# Altium PCB air_pod_case_ASCII2.PcbDoc
Units mm, origin at the board's own origin, x right, y up, seen from the top; angles counter-clockwise.
Board outline 166.05 x 139.83 mm, 2 copper layers (Top Layer, Bottom Layer); 9 components, 96 nets, 204 pads, 144 vias.
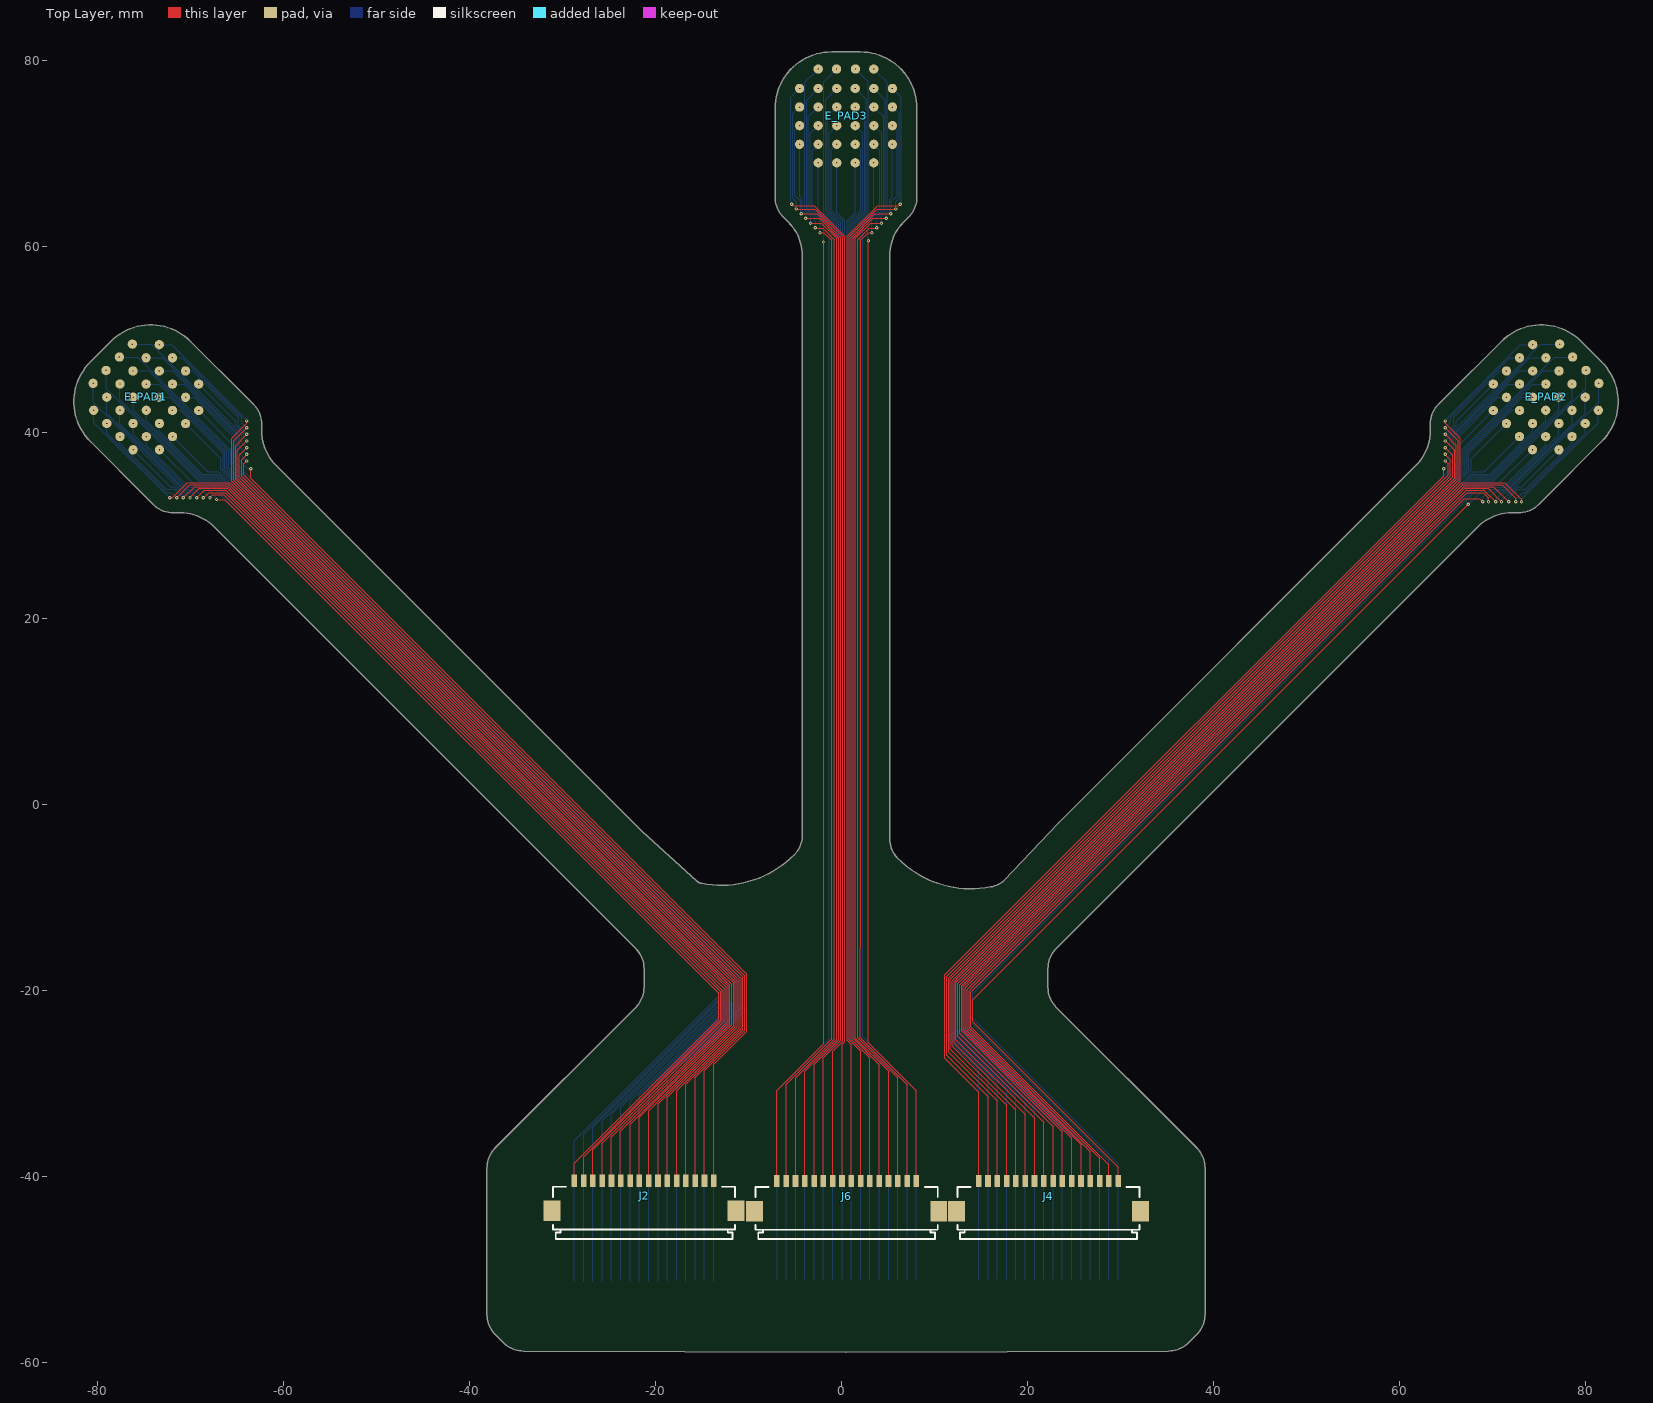
[diagram p0: Top Layer view]
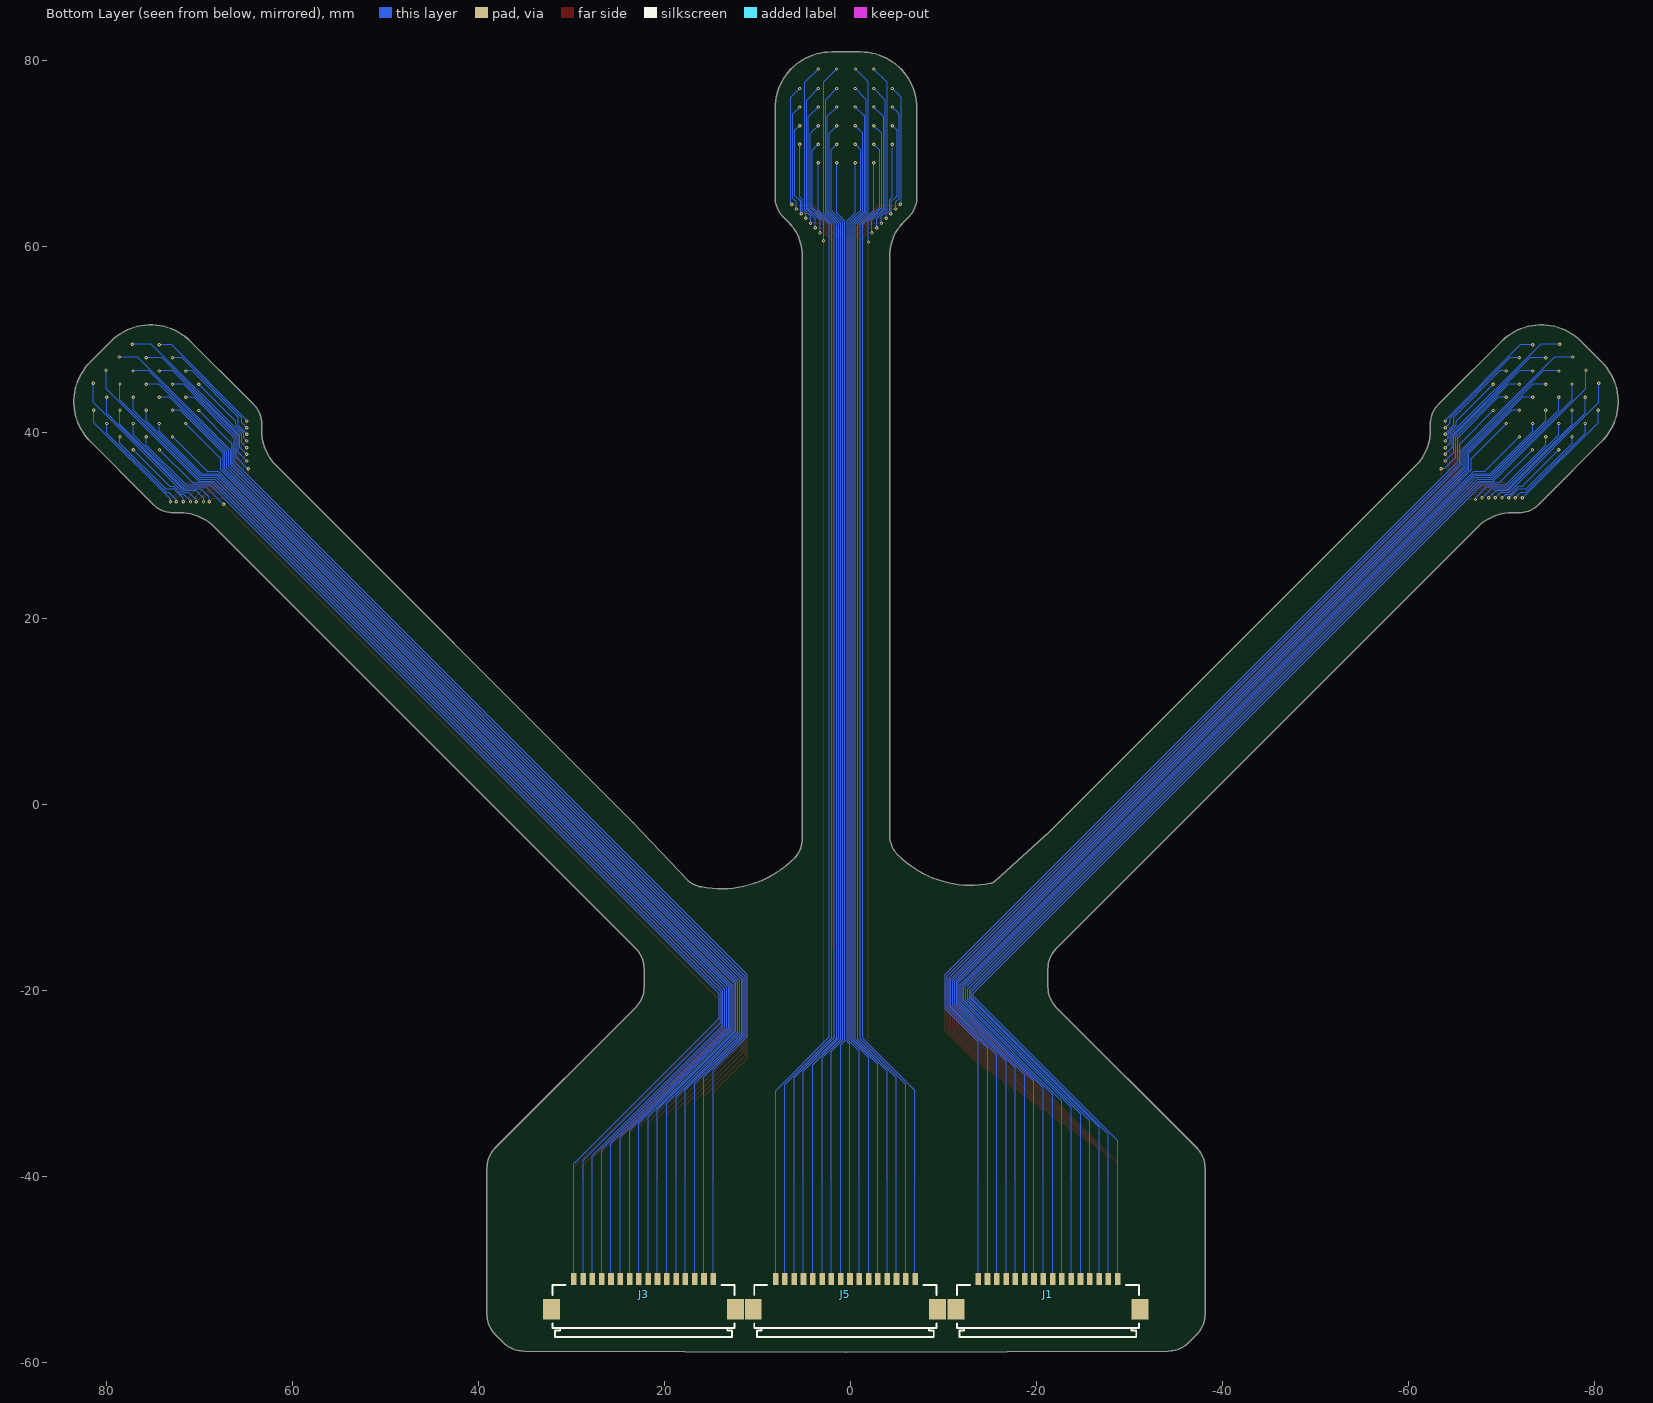
[diagram p1: Bottom Layer view, seen from below]

## Layer stack, top to bottom
Top Solder: solder mask 0.0102, Solder Resist, Dk 3.5
Top Layer: signal copper 0.0356
Dielectric 1: dielectric 0.32, FR-4, Dk 4.8
Bottom Layer: signal copper 0.0356
Bottom Solder: solder mask 0.0102, Solder Resist, Dk 3.5

## Board outline
-38.1,-54.864 -38.1,-39.116 cw(c-35.034,-39.116) -37.202,-36.948 -22.107,-21.853 ccw(c-24.275,-19.685) -21.209,-19.685 -21.209,-17.67 ccw(c-24.275,-17.67) -22.107,-15.502 -24.456,-13.153 -67.455,29.846 ccw(c-71.057,26.244) -71.057,31.338 -71.819,31.338 cw(c-71.819,34.404) -73.987,32.236 -74.526,32.774 -74.659,32.908 -80.745,38.993 cw(c-76.457,43.281) -80.745,47.569 -79.824,48.49 -79.465,48.849 -78.544,49.77 cw(c-74.256,45.482) -69.968,49.77 -63.883,43.684 -63.211,43.012 cw(c-65.379,40.844) -62.313,40.844 -62.313,40.082 ccw(c-57.219,40.082) -60.821,36.48 -21.378,-2.963 -15.552,-8.24 ccw(c-14.852,-7.544) -15.017,-8.518 -15.012,-8.518 ccw(c-12.933,2.379) -5.089,-5.465 -5.081,-5.462 ccw(c-7.249,-3.294) -4.183,-3.294 -4.183,1.778 -4.183,58.969 ccw(c-9.277,58.969) -5.675,62.571 -6.214,63.11 cw(c-4.046,65.278) -7.112,65.278 -7.112,74.835 cw(c-1.048,74.835) -1.048,80.899 2.064,80.899 cw(c2.064,74.835) 8.128,74.835 8.128,65.278 cw(c5.062,65.278) 7.23,63.11 6.691,62.571 ccw(c10.293,58.969) 5.199,58.969 5.199,1.651 5.199,-2.913 5.199,-3.675 ccw(c8.265,-3.675) 6.097,-5.843 6.105,-5.846 ccw(c13.949,1.998) 16.028,-8.899 ccw(c15.517,-5.876) 17.495,-8.218 23.346,-2.01 61.837,36.48 ccw(c58.235,40.082) 63.329,40.082 63.329,40.844 cw(c66.395,40.844) 64.227,43.012 64.765,43.551 64.899,43.684 70.984,49.77 cw(c75.272,45.482) 79.56,49.77 80.481,48.849 80.84,48.49 81.761,47.569 cw(c77.473,43.281) 81.761,38.993 75.675,32.908 75.003,32.236 cw(c72.835,34.404) 72.835,31.338 72.073,31.338 ccw(c72.073,26.244) 68.471,29.846 25.726,-12.899 25.472,-13.153 23.123,-15.502 ccw(c25.291,-17.67) 22.225,-17.67 22.225,-19.685 ccw(c25.291,-19.685) 23.123,-21.853 38.218,-36.948 cw(c36.05,-39.116) 39.116,-39.116 39.116,-54.864 cw(c36.05,-54.864) 38.218,-57.032 37.347,-57.903 cw(c35.179,-55.735) 35.179,-58.801 0.508,-58.928 -34.163,-58.801 cw(c-34.163,-55.735) -36.331,-57.903 -37.202,-57.032 cw(c-35.034,-54.864)
cut-out: -112.956,-207.435 -112.702,-207.435 -112.702,-207.181 -112.956,-207.181
cut-out: -112.956,-207.435 -112.702,-207.435 -112.702,-207.181 -112.956,-207.181

## Design rules (kind name [scope] priority, off if disabled: settings)
Clearance [All] p1: gap=0.254 ignorepadtopadclearanceinfootprint=FALSE except(0.1: Arc-Arc Arc-Track Arc-SMDPad Arc-THPad Arc-Via Arc-Fill Arc-Poly Arc-Region Arc-Text Arc-Hole Track-Track Track-SMDPad Track-THPad Track-Via Track-Fill Track-Poly Track-Region Track-Text Track-Hole)
PolygonConnect [All] p1: connectstyle=Relief reliefconductorwidth=0.254 reliefentries=4 polygonreliefangle="90 Angle" airgapwidth=0.254
RoutingVias [All] p1: holewidth=0.15 width=0.35 viastyle="Through Hole" minholewidth=0.15 minwidth=1.27 maxholewidth=1 maxwidth=1
SolderMaskExpansion [All] p1: expansion=0.102 istentingtop=FALSE
Width [All] p1: maxlimit=0.1 minlimit=0.1 preferedwidth=0.1 minimp=50.000000 maximp=50.000000 favimp=50.000000
30 further rules are at their usual default settings.

## Components (designator, comment, footprint, x,y, rotation, side; value= is the part's Value field where it differs from the comment)
E_PAD1 "electrode_pads" 32_electrode_pads#1 -68.06,37.085 r45 top
E_PAD2 "electrode_pads" 32_electrode_pads#2 69.076,37.085 r315 top
E_PAD3 "electrode_pads" 32_electrode_pads#3 0.508,64.516 r0 top
J1 "FH12-16S-1SH(55)" FH12-16S-1SH(55) -21.336,-54.052 r0 bottom
J2 "FH12-16S-1SH(55)" FH12-16S-1SH(55) -21.082,-43.484 r180 top
J3 "FH12-16S-1SH(55)" FH12-16S-1SH(55) 22.153,-54.052 r0 bottom
J4 "FH12-16S-1SH(55)" FH12-16S-1SH(55) 22.407,-43.511 r180 top
J5 "FH12-16S-1SH(55)" FH12-16S-1SH(55) 0.452,-54.052 r0 bottom
J6 "FH12-16S-1SH(55)" FH12-16S-1SH(55) 0.706,-43.511 r180 top

## Footprints (in the part's own frame and the unit in brackets; to place one, negate y for a bottom-side part, rotate by r counter-clockwise, add the part's x,y. Pads: shape width x height; smd on the part's side, far side on the other; paste and mask are expansions set on the pad)
32_electrode_pads#1 [mm]
  round 1 smd: 1(-2.991,6.45) 2(-2.984,4.45) 3(-1.016,14.541) 4(-0.991,12.45) 5(-0.991,10.45) 6(-0.991,8.45) 7(-0.991,6.45) 8(-0.991,4.45) 9(0.991,4.45) 10(0.991,6.45) 11(0.991,8.45) 12(0.991,10.45) 13(0.991,12.45) 14(1.016,14.541) 15(2.984,4.45) 16(2.991,6.45) 17(-2.991,8.45) 18(-2.991,10.45) 19(-2.991,12.45) 20(-2.984,14.541) 21(-4.991,6.45) 22(-4.991,8.45) 23(-4.991,10.45) 24(-4.991,12.45) 25(4.991,12.45) 26(4.991,10.45) 27(4.991,8.45) 28(4.991,6.45) 29(2.984,14.541) 30(2.991,12.45) 31(2.991,10.45) 32(2.991,8.45)
  Top Layer lines w0.1: -5.842,0 -5.677,-0.165 -3.391,-0.165 -0.127,-3.429 -0.127,-78.39 ; -5.334,-0.508 -5.324,-0.518 -3.321,-0.518 -0.344,-3.495 -0.344,-78.12 ; -4.826,-1.016 -3.117,-1.016 -0.544,-3.59 -0.544,-77.941 ; -4.318,-1.524 -2.892,-1.524 -0.762,-3.654 -0.762,-77.671 ; -3.81,-2.032 -2.667,-2.032 -1.016,-3.683 -1.016,-77.402 ; -3.303,-2.541 -3.267,-2.578 -2.502,-2.578 -1.27,-3.81 -1.27,-77.133 ; -2.794,-3.048 -2.37,-3.048 -1.524,-3.894 -1.524,-76.863 ; 2.794,-3.048 2.37,-3.048 1.524,-3.894 1.524,-79.999 ; 3.81,-2.032 2.667,-2.032 1.016,-3.683 1.016,-79.467 ; 4.318,-1.524 2.892,-1.524 0.762,-3.654 0.762,-79.198 ; 4.826,-1.016 3.117,-1.016 0.544,-3.59 0.544,-79.018 ; 5.334,-0.508 5.324,-0.518 3.321,-0.518 0.344,-3.495 0.344,-78.839 ; 5.842,0 5.677,-0.165 3.391,-0.165 0.127,-3.429 0.127,-78.659 ; 3.303,-2.541 3.267,-2.578 2.502,-2.578 1.27,-3.81 1.27,-79.737 ; 1.778,-4.671 1.778,-80.082
  Bottom Layer lines w0.1: -2.984,14.541 -4.433,13.092 -4.433,-0.645 -3.81,-1.268 -3.81,-2.032 ; -4.991,12.45 -5.921,11.52 -5.921,0.133 -5.842,0.054 -5.842,0 ; -1.016,14.541 -1.435,14.122 ; -4.991,10.45 -5.721,9.72 -5.721,0.641 -5.334,0.254 -5.334,-0.508 ; -2.991,12.45 -4.233,11.208 -4.233,-0.562 -3.302,-1.493 -3.302,-2.54 -3.303,-2.541 ; 1.016,14.541 1.435,14.122 ; -4.991,8.45 -5.504,7.937 -5.504,0.932 -4.883,0.311 -4.883,-0.761 -4.864,-0.779 -4.864,-0.978 -4.826,-1.016 ; -2.991,10.45 -4.033,9.408 -4.033,-0.479 -2.794,-1.718 -2.794,-3.04 ; -0.991,12.45 -2.194,11.247 -2.194,-0.904 -1.016,-2.082 -1.016,-79.467 ; 2.984,14.541 4.433,13.092 4.433,-0.645 3.81,-1.268 3.81,-2.032 ; 0.991,12.45 2.194,11.247 2.194,-0.904 0.962,-2.136 0.962,-80.023 0.962,-80.049 ; -4.991,6.45 -4.991,0.8 -4.683,0.492 -4.683,-0.678 -4.318,-1.043 -4.318,-1.524 ; -2.991,8.45 -3.833,7.608 -3.833,-0.396 -2.286,-1.943 ; -0.991,10.45 -1.994,9.447 -1.994,-0.821 -0.762,-2.053 -0.762,-79.467 ; 0.991,10.45 1.994,9.447 1.994,-0.821 0.762,-2.053 0.762,-79.944 ; 2.991,12.45 4.233,11.208 4.233,-0.562 3.302,-1.493 3.302,-2.54 3.303,-2.541 ; -2.991,6.45 -3.633,5.808 -3.633,-0.314 -1.778,-2.169 -1.778,-79.378 ; -0.991,8.45 -1.794,7.647 -1.794,-0.738 -0.547,-1.986 -0.547,-79.578 ; 0.991,8.45 1.794,7.647 1.794,-0.738 0.547,-1.986 0.547,-79.882 ; 2.991,10.45 4.033,9.408 4.033,-0.479 2.794,-1.718 2.794,-3.04 ; 4.991,12.45 5.921,11.52 5.921,0.133 5.842,0.054 5.842,0 ; -0.991,6.45 -1.594,5.847 -1.594,-0.655 -0.347,-1.903 ; -2.984,4.45 -2.984,-0.68 -1.524,-2.14 -1.524,-79.424 ; 0.991,6.45 1.594,5.847 1.594,-0.655 0.347,-1.903 0.347,-79.801 ; 2.991,8.45 3.833,7.608 3.833,-0.396 2.286,-1.943 ; 4.991,10.45 5.721,9.72 5.721,0.641 5.334,0.254 5.334,-0.508 ; -0.991,4.45 -0.991,-0.914 -0.147,-1.758 -0.147,-79.737 ; 0.991,4.45 0.991,-0.914 0.147,-1.758 0.147,-79.733 ; 2.991,6.45 3.633,5.808 3.633,-0.314 1.778,-2.169 1.778,-80.082 ; 4.991,8.45 5.504,7.937 5.504,0.932 4.883,0.311 4.883,-0.761 4.864,-0.779 4.864,-0.978 4.826,-1.016 ; 2.984,4.45 2.984,-0.68 1.517,-2.146 1.517,-80.006 ; 4.991,6.45 4.991,0.8 4.683,0.492 4.683,-0.678 4.318,-1.043 4.318,-1.524 ; 1.27,-80.006 1.27,-2.111 2.394,-0.987 2.394,13.163 1.435,14.122 ; -1.435,14.122 -2.394,13.163 -2.394,-0.987 -1.27,-2.111 -1.27,-79.453 ; -1.435,14.122 -1.435,14.122 ; 1.435,14.122 1.435,14.122 ; -1.27,-79.453 -1.27,-79.453
32_electrode_pads#2 [mm]
  round 1 smd: 1(-2.991,6.45) 2(-2.984,4.45) 3(-1.016,14.541) 4(-0.991,12.45) 5(-0.991,10.45) 6(-0.991,8.45) 7(-0.991,6.45) 8(-0.991,4.45) 9(0.991,4.45) 10(0.991,6.45) 11(0.991,8.45) 12(0.991,10.45) 13(0.991,12.45) 14(1.016,14.541) 15(2.984,4.45) 16(2.991,6.45) 17(-2.991,8.45) 18(-2.991,10.45) 19(-2.991,12.45) 20(-2.984,14.541) 21(-4.991,6.45) 22(-4.991,8.45) 23(-4.991,10.45) 24(-4.991,12.45) 25(4.991,12.45) 26(4.991,10.45) 27(4.991,8.45) 28(4.991,6.45) 29(2.984,14.541) 30(2.991,12.45) 31(2.991,10.45) 32(2.991,8.45)
  Top Layer lines w0.1: -1.524,-79.626 -1.524,-3.894 -2.37,-3.048 -2.794,-3.048 ; -1.27,-79.467 -1.27,-3.81 -2.502,-2.578 -3.267,-2.578 -3.303,-2.541 ; -1.016,-79.47 -1.016,-3.683 -2.667,-2.032 -3.81,-2.032 ; -0.762,-79.357 -0.762,-3.654 -2.892,-1.524 -4.318,-1.524 ; -0.544,-79.177 -0.544,-3.59 -3.117,-1.016 -4.826,-1.016 ; -0.344,-78.92 -0.344,-3.495 -3.321,-0.518 -5.324,-0.518 -5.334,-0.508 ; 0.127,-79.267 0.127,-3.429 3.391,-0.165 5.677,-0.165 ; -0.127,-78.818 -0.127,-3.429 -3.391,-0.165 -5.677,-0.165 -5.842,0 ; 0.762,-79.198 0.762,-3.654 2.538,-1.878 4.589,-1.878 ; 0.344,-78.749 0.344,-3.495 3.321,-0.518 5.324,-0.518 ; 0.544,-78.818 0.544,-3.59 2.794,-1.339 5.128,-1.339 ; 1.016,-79.198 1.016,-3.683 2.372,-2.327 4.14,-2.327 ; 1.27,-79.108 1.27,-3.81 2.502,-2.578 3.267,-2.578 ; -1.778,-4.312 -2.326,-3.764 ; 1.524,-4.484 2.693,-3.315 3.152,-3.315
  Bottom Layer lines w0.1: -1.765,-80.169 -1.778,-80.156 -1.778,-2.169 -3.633,-0.314 -3.633,5.808 -2.991,6.45 ; -1.524,-80.082 -1.524,-2.14 -2.984,-0.68 -2.984,4.45 ; -1.27,-79.177 -1.27,-2.111 -2.394,-0.987 -2.394,13.163 -1.435,14.122 ; -1.016,-78.891 -1.016,-2.082 -2.194,-0.904 -2.194,11.247 -0.991,12.45 ; -0.762,-78.839 -0.762,-2.053 -1.994,-0.821 -1.994,9.447 -0.991,10.45 ; -0.547,-78.463 -0.547,-1.986 -1.794,-0.738 -1.794,7.647 -0.991,8.45 ; -0.347,-78.659 -0.347,-1.903 -1.594,-0.655 -1.594,5.847 -0.991,6.45 ; -0.147,-78.688 -0.147,-1.758 -0.991,-0.914 -0.991,4.45 ; 0.147,-78.659 0.147,-1.758 0.991,-0.914 0.991,4.45 ; 0.347,-78.556 0.347,-1.903 1.594,-0.655 1.594,5.847 0.991,6.45 ; 0.547,-78.308 0.547,-1.986 1.794,-0.738 1.794,7.647 0.991,8.45 ; 0.762,-78.398 0.762,-2.053 1.994,-0.821 1.994,9.447 0.991,10.45 ; 1.016,-78.308 1.016,-2.082 2.194,-0.904 2.194,11.247 0.991,12.45 ; 1.27,-78.308 1.27,-2.111 2.394,-0.987 2.394,13.163 1.435,14.122 ; 1.524,-78.038 1.524,-2.14 2.984,-0.68 2.984,4.45 ; -3.303,-2.541 -3.302,-2.54 -3.302,-1.493 -4.233,-0.562 -4.233,11.208 -2.991,12.45 ; -3.81,-2.032 -3.81,-1.268 -4.433,-0.645 -4.433,13.092 -2.984,14.541 ; -4.318,-1.524 -4.318,-1.043 -4.683,-0.678 -4.683,0.492 -4.991,0.8 -4.991,6.45 ; -4.826,-1.016 -4.864,-0.978 -4.864,-0.779 -4.883,-0.761 -4.883,0.311 -5.504,0.932 -5.504,7.937 -4.991,8.45 ; -5.334,-0.508 -5.334,0.254 -5.721,0.641 -5.721,9.72 -4.991,10.45 ; -5.842,0 -5.842,0.054 -5.921,0.133 -5.921,11.52 -4.991,12.45 ; -2.794,-3.04 -2.794,-1.718 -4.033,-0.479 -4.033,9.408 -2.991,10.45 ; -2.286,-1.943 -3.833,-0.396 -3.833,7.608 -2.991,8.45 ; 3.152,-3.315 2.794,-2.957 2.794,-1.718 4.033,-0.479 4.033,9.408 2.991,10.45 ; 2.286,-1.943 3.833,-0.396 3.833,7.608 2.991,8.45 ; 3.302,-2.54 3.302,-1.493 4.233,-0.562 4.233,11.208 2.991,12.45 ; 3.993,-1.085 4.433,-0.645 4.433,13.092 2.984,14.541 ; 3.633,-0.314 3.633,5.808 2.991,6.45 ; 4.501,-0.86 4.683,-0.678 4.683,0.492 4.991,0.8 4.991,6.45 ; 4.864,-0.978 4.883,-0.959 4.883,-0.761 4.883,0.311 5.504,0.932 5.504,7.937 4.991,8.45 ; 5.517,0.437 5.721,0.641 5.721,9.72 4.991,10.45 ; 5.921,0.133 5.921,11.52 4.991,12.45 ; -1.016,14.541 -1.435,14.122 ; 1.016,14.541 1.435,14.122 ; -1.435,14.122 -1.435,14.122 ; 1.435,14.122 1.435,14.122
32_electrode_pads#3 [mm]
  round 1 smd: 1(-2.991,6.45) 2(-2.984,4.45) 3(-1.016,14.541) 4(-0.991,12.45) 5(-0.991,10.45) 6(-0.991,8.45) 7(-0.991,6.45) 8(-0.991,4.45) 9(0.991,4.45) 10(0.991,6.45) 11(0.991,8.45) 12(0.991,10.45) 13(0.991,12.45) 14(1.016,14.541) 15(2.984,4.45) 16(2.991,6.45) 17(-2.991,8.45) 18(-2.991,10.45) 19(-2.991,12.45) 20(-2.984,14.541) 21(-4.991,6.45) 22(-4.991,8.45) 23(-4.991,10.45) 24(-4.991,12.45) 25(4.991,12.45) 26(4.991,10.45) 27(4.991,8.45) 28(4.991,6.45) 29(2.984,14.541) 30(2.991,12.45) 31(2.991,10.45) 32(2.991,8.45)
  Top Layer lines w0.1: -5.842,0 -5.677,-0.165 -3.391,-0.165 -0.127,-3.429 -0.127,-80.082 ; -5.334,-0.508 -5.324,-0.518 -3.321,-0.518 -0.344,-3.495 -0.344,-80.082 ; -4.826,-1.016 -3.117,-1.016 -0.544,-3.59 -0.544,-80.082 ; -4.318,-1.524 -2.892,-1.524 -0.762,-3.654 -0.762,-80.082 ; -3.81,-2.032 -2.667,-2.032 -1.016,-3.683 -1.016,-80.082 ; -3.303,-2.541 -3.267,-2.578 -2.502,-2.578 -1.27,-3.81 -1.27,-80.082 ; -2.794,-3.048 -2.37,-3.048 -1.524,-3.894 -1.524,-80.082 ; 0.127,-80.082 0.127,-3.429 3.391,-0.165 5.677,-0.165 5.842,0 ; 0.344,-80.082 0.344,-3.495 3.321,-0.518 5.324,-0.518 5.334,-0.508 ; 0.544,-80.082 0.544,-3.59 3.117,-1.016 4.826,-1.016 ; 0.762,-80.082 0.762,-3.654 2.892,-1.524 4.318,-1.524 ; 1.016,-80.082 1.016,-3.683 2.667,-2.032 3.81,-2.032 ; 1.27,-80.137 1.27,-3.81 2.502,-2.578 3.267,-2.578 3.303,-2.541 ; 1.524,-80.082 1.524,-3.894 2.37,-3.048 2.794,-3.048
  Bottom Layer lines w0.1: -5.842,0 -5.842,0.054 -5.921,0.133 -5.921,11.52 -4.991,12.45 ; -5.334,-0.508 -5.334,0.254 -5.721,0.641 -5.721,9.72 -4.991,10.45 ; -4.991,6.45 -4.991,0.8 -4.683,0.492 -4.683,-0.678 -4.318,-1.043 -4.318,-1.524 ; -4.991,8.45 -5.504,7.937 -5.504,0.932 -4.883,0.311 -4.883,-0.761 -4.864,-0.779 -4.864,-0.978 -4.826,-1.016 ; -3.81,-2.032 -3.81,-1.268 -4.433,-0.645 -4.433,13.092 -2.984,14.541 ; -3.303,-2.541 -3.302,-2.54 -3.302,-1.493 -4.233,-0.562 -4.233,11.208 -2.991,12.45 ; -2.991,6.45 -3.633,5.808 -3.633,-0.314 -1.778,-2.169 -1.778,-80.128 -1.778,-80.169 ; -2.991,8.45 -3.833,7.608 -3.833,-0.396 -2.413,-1.816 ; -2.991,10.45 -4.033,9.408 -4.033,-0.479 -2.794,-1.718 -2.794,-3.04 ; -2.984,4.45 -2.984,-0.68 -1.524,-2.14 -1.524,-80.082 ; -1.27,-80.082 -1.27,-80.069 -1.27,-2.111 -2.394,-0.987 -2.394,13.163 -1.435,14.122 ; -1.016,-80.082 -1.016,-2.082 -2.194,-0.904 -2.194,11.247 -0.991,12.45 ; -1.016,14.541 -1.435,14.122 ; -0.991,4.45 -0.991,-0.914 -0.147,-1.758 ; -0.991,6.45 -1.594,5.847 -1.594,-0.655 -0.347,-1.903 -0.347,-80.082 ; -0.991,8.45 -1.794,7.647 -1.794,-0.738 -0.547,-1.986 -0.547,-80.082 ; -0.991,10.45 -1.994,9.447 -1.994,-0.821 -0.762,-2.053 -0.762,-80.01 ; 0.147,-80.082 0.147,-1.758 0.991,-0.914 0.991,4.45 ; 0.347,-80.082 0.347,-1.903 1.594,-0.655 1.594,5.847 0.991,6.45 ; 0.547,-80.082 0.547,-1.986 1.794,-0.738 1.794,7.647 0.991,8.45 ; 0.762,-80.01 0.762,-2.053 1.994,-0.821 1.994,9.447 0.991,10.45 ; 0.991,12.45 2.194,11.247 2.194,-0.904 1.016,-2.082 1.016,-80.082 ; 1.016,14.541 1.435,14.122 ; 1.27,-80.082 1.27,-2.111 2.394,-0.987 2.394,13.163 1.435,14.122 ; 1.524,-80.082 1.524,-2.14 2.984,-0.68 2.984,4.45 ; 1.778,-80.082 1.778,-2.169 3.633,-0.314 3.633,5.808 2.991,6.45 ; 2.413,-1.816 3.833,-0.396 3.833,7.608 2.991,8.45 ; 2.794,-3.04 2.794,-1.718 4.033,-0.479 4.033,9.408 2.991,10.45 ; 2.984,14.541 4.433,13.092 4.433,-0.645 3.81,-1.268 3.81,-2.032 ; 2.991,12.45 4.233,11.208 4.233,-0.562 3.302,-1.493 3.302,-2.54 3.303,-2.541 ; 4.318,-1.524 4.318,-1.043 4.683,-0.678 4.683,0.492 4.991,0.8 4.991,6.45 ; 4.826,-1.016 4.864,-0.978 4.864,-0.779 4.883,-0.761 4.883,0.311 5.504,0.932 5.504,7.937 4.991,8.45 ; 4.991,10.45 5.721,9.72 5.721,0.641 5.334,0.254 5.334,-0.508 ; 4.991,12.45 5.921,11.52 5.921,0.133 5.842,0.054 5.842,0 ; -1.435,14.122 -1.435,14.122 ; 1.435,14.122 1.435,14.122
FH12-16S-1SH(55) [mm] "FH12-16S-1SH(55)"
  rect 0.6x1.3 smd: 1(7.627,-2.998) 2(6.627,-2.998) 3(5.627,-2.998) 4(4.627,-2.998) 5(3.627,-2.998) 6(2.627,-2.998) 7(1.627,-2.998) 8(0.627,-2.998) 9(-0.373,-2.998) 10(-1.373,-2.998) 11(-2.373,-2.998) 12(-3.373,-2.998) 13(-4.373,-2.998) 14(-5.373,-2.998) 15(-6.373,-2.998) 16(-7.373,-2.998)
  rect 1.8x2.2 smd: 17(10.027,0.252) 18(-9.773,0.252)
  silkscreen extent -9.67,-2.35 9.93,3.25, body extent -10.23,-3.25 10.37,3.15, height 2.04

## Via types
v1: diameter 0.36, hole 0.15, Top Layer to Bottom Layer, tented bottom, 96 vias
v2: diameter 0.36, hole 0.15, Top Layer to Bottom Layer, tented both sides, 48 vias

## Nets (pads, with @x,y where several pads share a name; then routed paths per layer and width w, separated by ;. In a path a pad name is that pad's centre, name@x,y a point inside that pad or via, vN(x,y) a via of type N, cw(c..) or ccw(c..) an arc to the next point about the centre after c; other vN are vias at no path point)
NetE_PAD1_1: E_PAD1.1 J1.16 | length 37.4
  Bottom Layer w0.1: J1.16@-28.709,-51.308 J1.16 -28.709,-36.186 -13.176,-20.653 -13.176,-20.313
  other v1: -74.736,39.531
NetE_PAD1_2: E_PAD1.2 J1.15 | length 37.3
  Bottom Layer w0.1: J1.15@-27.709,-51.308 J1.15 -27.709,-35.469 -12.976,-20.736 -12.976,-20.154
  other v1: -73.317,38.122
NetE_PAD1_3: E_PAD1.3 J1.14 | length 37.1
  Bottom Layer w0.1: J1.14@-26.709,-51.308 -26.709,-34.751 -12.776,-20.819 -12.776,-19.995
  other v1: -79.06,46.649
NetE_PAD1_4: E_PAD1.4 J1.13 | length 36.9
  Bottom Layer w0.1: J1.13@-25.709,-51.308 J1.13 -25.709,-34.034 -12.576,-20.901 -12.576,-19.836
  other v1: -77.564,45.188
NetE_PAD1_5: E_PAD1.5 J1.12 | length 36.7
  Bottom Layer w0.1: J1.12@-24.709,-51.308 J1.12 -24.709,-33.317 -12.376,-20.984 -12.376,-19.676
  other v1: -76.15,43.774
NetE_PAD1_6: E_PAD1.6 J1.11 | length 36.3
  Bottom Layer w0.1: J1.11 -23.709,-32.6 -12.176,-21.067 -12.176,-19.572
  other v1: -74.736,42.359
NetE_PAD1_7: E_PAD1.7 J1.10 | length 114
  Bottom Layer w0.1: -66.96,35.494 -11.976,-19.489 -11.976,-21.201 -22.709,-31.934 J1.10 J1.10@-22.709,-51.308
  other v1: -73.322,40.945
NetE_PAD1_8: E_PAD1.8 J1.9 | length 36
  Bottom Layer w0.1: J1.9@-21.709,-51.308 J1.9 -21.709,-31.217 -11.776,-21.284 -11.776,-19.378
  other v1: -71.907,39.531
NetE_PAD1_9: E_PAD1.9 J1.8 | length 35.9
  Bottom Layer w0.1: J1.8@-20.709,-51.308 J1.8 -20.709,-30.5 -11.576,-21.367 -11.576,-19.191
  other v1: -70.506,40.932
NetE_PAD1_10: E_PAD1.10 J1.7 | length 35.6
  Bottom Layer w0.1: J1.7@-19.685,-51.308 -19.685,-29.758 -11.376,-21.45 -11.376,-19.113
  other v1: -71.92,42.347
NetE_PAD1_11: E_PAD1.11 J1.6 | length 35.4
  Bottom Layer w0.1: J1.6@-18.709,-51.308 J1.6 -18.709,-29.065 -11.176,-21.533 -11.176,-19.03
  other v1: -73.334,43.761
NetE_PAD1_12: E_PAD1.12 J1.5 | length 34.9
  Bottom Layer w0.1: J1.5 -17.709,-28.348 -10.976,-21.615 -10.976,-18.921
  other v1: -74.749,45.175
NetE_PAD1_13: E_PAD1.13 J1.4 | length 35
  Bottom Layer w0.1: J1.4@-16.709,-51.308 J1.4 -16.709,-27.631 -10.776,-21.698 -10.776,-18.838 -10.795,-18.82
  other v1: -76.163,46.589
NetE_PAD1_14: E_PAD1.14 J1.3 | length 34.6
  Bottom Layer w0.1: J1.3 -15.709,-26.914 -10.576,-21.781 -10.576,-18.603
  other v1: -77.624,48.085
NetE_PAD1_15: E_PAD1.15 J1.2 | length 34.4
  Bottom Layer w0.1: J1.2 -14.709,-26.237 -10.376,-21.904 -10.376,-18.453 -10.414,-18.415
  other v1: -69.097,42.342
NetE_PAD1_16: E_PAD1.16 J1.1 | length 34.5
  Bottom Layer w0.1: J1.1@-13.716,-51.308 -13.716,-25.527 -10.176,-21.987 -10.176,-18.284
  other v1: -70.506,43.761
NetE_PAD1_17: E_PAD1.17 J2.1 | length 104.4
  Top Layer w0.1: v2(-67.183,32.766) -66.284,32.766 -13.176,-20.342 -13.176,-23.082 -28.709,-38.615 J2.1
  Bottom Layer w0.1: -68.302,34.094 -67.183,32.975 v2(-67.183,32.766)
  other v1: -76.15,40.945
NetE_PAD1_18: E_PAD1.18 J2.2 | length 29
  Top Layer w0.1: J2.2 -27.709,-37.898 -12.976,-23.165 -12.976,-20.154 -14.787,-18.343
  other v1: -77.564,42.359
  other v2: -67.88,32.954
NetE_PAD1_19: E_PAD1.19 J2.3 | length 28.6
  Top Layer w0.1: J2.3 -26.709,-37.181 -12.776,-23.248 -12.776,-19.995 -14.417,-18.354
  other v1: -78.978,43.774
  other v2: -68.599,32.952
NetE_PAD1_20: E_PAD1.20 J2.4 | length 28.2
  Top Layer w0.1: J2.4 -25.709,-36.464 -12.576,-23.331 -12.576,-19.836 -14.047,-18.365
  other v1: -80.452,45.257
  other v2: -69.317,32.954
NetE_PAD1_21: E_PAD1.21 J2.5 | length 27.8
  Top Layer w0.1: J2.5 -24.709,-35.822 -12.376,-23.489 -12.376,-19.676 -13.677,-18.376
  other v1: -76.15,38.117
  other v2: -70.036,32.954
NetE_PAD1_22: E_PAD1.22 J2.6 | length 27.4
  Top Layer w0.1: J2.6 -23.749,-40.446 -23.749,-35.145 -12.176,-23.572 -12.176,-19.568 -13.264,-18.48 -13.332,-18.412
  other v1: -77.564,39.531
  other v2: -70.754,32.954
NetE_PAD1_23: E_PAD1.23 J2.7 | length 27
  Top Layer w0.1: J2.7 -22.709,-34.387 -11.976,-23.655 -11.976,-19.485 -13.064,-18.398
  other v1: -78.978,40.945
  other v2: -71.472,32.954
NetE_PAD1_24: E_PAD1.24 J2.8 | length 26.6
  Top Layer w0.1: J2.8 -21.709,-33.67 -11.776,-23.738 -11.776,-19.378 -12.72,-18.435
  other v1: -80.393,42.359
  other v2: -72.191,32.954
NetE_PAD1_25: E_PAD1.25 J2.9 | length 26.1
  Top Layer w0.1: J2.9 -20.709,-32.953 -11.576,-23.82 -11.576,-19.219 -12.35,-18.446
  other v1: -73.334,49.418
  other v2: -63.929,41.216
NetE_PAD1_26: E_PAD1.26 J2.10 | length 25.8
  Top Layer w0.1: J2.10 -19.685,-40.462 -19.685,-32.212 -11.376,-23.903 -11.376,-19.113 -12.001,-18.488 -12.069,-18.419
  other v1: -71.92,48.003
  other v2: -63.929,40.497
NetE_PAD1_27: E_PAD1.27 J2.11 | length 25.5
  Top Layer w0.1: J2.11 -18.709,-31.519 -11.176,-23.986 -11.176,-19.03 -11.801,-18.405
  other v1: -70.506,46.589
  other v2: -63.929,39.779
NetE_PAD1_28: E_PAD1.28 J2.12 | length 25.1
  Top Layer w0.1: J2.12 -17.709,-30.802 -10.976,-24.069 -10.976,-18.921 -11.52,-18.378
  other v1: -69.092,45.175
  other v2: -63.929,39.061
NetE_PAD1_29: E_PAD1.29 J2.13 | length 24.7
  Top Layer w0.1: J2.13 -16.709,-30.084 -10.776,-24.152 -10.776,-18.762 -11.15,-18.389
  other v1: -76.232,49.477
  other v2: -63.929,38.342
NetE_PAD1_30: E_PAD1.30 J2.14 | length 24.3
  Top Layer w0.1: J2.14 -15.709,-29.367 -10.576,-24.235 -10.576,-18.603 -10.779,-18.399
  other v1: -74.749,48.003
  other v2: -63.927,37.624
NetE_PAD1_31: E_PAD1.31 J2.15 | length 23.9
  Top Layer w0.1: J2.15 -14.709,-28.65 -10.376,-24.317 -10.376,-18.443 -10.414,-18.405
  other v1: -73.334,46.589
  other v2: -63.929,36.905
NetE_PAD1_32: E_PAD1.32 J2.16 | length 26.8
  Top Layer w0.1: -63.5,35.039 v2(-63.5,36.068) ; J2.16 -13.716,-40.479 -13.716,-27.94 -10.176,-24.4 -10.176,-18.284
  Bottom Layer w0.1: -65.069,37.327 -63.81,36.068 v2(-63.5,36.068)
  other v1: -71.92,45.175
NetE_PAD2_1: E_PAD2.1 J3.16 | length 34.2
  Bottom Layer w0.1: 11.14,-18.355 11.14,-24.928 14.78,-28.568 J3.16
  other v1: 71.522,43.761
NetE_PAD2_2: E_PAD2.2 J3.15 | length 34.4
  Bottom Layer w0.1: 11.372,-18.464 11.34,-18.496 11.34,-24.845 15.78,-29.285 J3.15
  other v1: 70.113,42.342
NetE_PAD2_3: E_PAD2.3 J3.14 | length 35.5
  Bottom Layer w0.1: 12.191,-18.004 11.54,-18.655 11.54,-24.762 16.78,-30.002 J3.14
  other v1: 78.64,48.085
NetE_PAD2_4: E_PAD2.4 J3.13 | length 35.9
  Bottom Layer w0.1: 12.573,-17.981 11.74,-18.814 11.74,-24.679 17.78,-30.719 J3.13
  other v1: 77.179,46.589
NetE_PAD2_5: E_PAD2.5 J3.12 | length 36.1
  Bottom Layer w0.1: 12.79,-18.124 11.94,-18.973 11.94,-24.596 18.78,-31.436 J3.12
  other v1: 75.765,45.175
NetE_PAD2_6: E_PAD2.6 J3.11 | length 36.7
  Bottom Layer w0.1: 13.208,-18.01 12.14,-19.078 12.14,-24.513 19.78,-32.153 J3.11
  other v1: 74.35,43.761
NetE_PAD2_7: E_PAD2.7 J3.10 | length 36.6
  Bottom Layer w0.1: 13.21,-18.29 12.34,-19.161 12.34,-24.43 20.78,-32.871 J3.10
  other v1: 72.936,42.347
NetE_PAD2_8: E_PAD2.8 J3.9 | length 36.8
  Bottom Layer w0.1: 13.332,-18.452 12.54,-19.244 12.54,-24.348 21.78,-33.588 J3.9
  other v1: 71.522,40.932
NetE_PAD2_9: E_PAD2.9 J3.8 | length 36.9
  Bottom Layer w0.1: 13.559,-18.639 12.74,-19.458 12.74,-24.265 22.78,-34.305 J3.8
  other v1: 72.923,39.531
NetE_PAD2_10: E_PAD2.10 J3.7 | length 37.2
  Bottom Layer w0.1: 13.774,-18.708 12.94,-19.541 12.94,-24.182 23.78,-35.022 J3.7
  other v1: 74.338,40.945
NetE_PAD2_11: E_PAD2.11 J3.6 | length 37.6
  Bottom Layer w0.1: 14.091,-18.674 13.14,-19.624 13.14,-24.099 24.78,-35.739 J3.6
  other v1: 75.752,42.359
NetE_PAD2_12: E_PAD2.12 J3.5 | length 37.7
  Bottom Layer w0.1: 14.179,-18.889 13.34,-19.729 13.34,-24.016 25.78,-36.456 J3.5
  other v1: 77.166,43.774
NetE_PAD2_13: E_PAD2.13 J3.4 | length 37.9
  Bottom Layer w0.1: 14.422,-19.005 13.54,-19.888 13.54,-23.858 26.78,-37.098 J3.4
  other v1: 78.58,45.188
NetE_PAD2_14: E_PAD2.14 J3.3 | length 38
  Bottom Layer w0.1: 14.602,-19.185 13.74,-20.047 13.74,-23.775 27.78,-37.815 J3.3
  other v1: 80.076,46.649
NetE_PAD2_15: E_PAD2.15 J3.2 | length 38.5
  Bottom Layer w0.1: 14.972,-19.174 13.94,-20.206 13.94,-23.465 28.78,-38.305 J3.2
  other v1: 74.333,38.122
NetE_PAD2_16: E_PAD2.16 J3.1 | length 117.1
  Bottom Layer w0.1: J3.1 29.78,-38.67 14.14,-23.03 14.14,-20.366 68.8,34.294 71.423,34.294
  other v1: 75.752,39.531
NetE_PAD2_17: E_PAD2.17 J4.1 | length 101.4
  Top Layer w0.1: J4.1 14.78,-30.949 11.136,-27.305 11.136,-18.341 11.69,-17.786 64.77,35.293
  Bottom Layer w0.1: v2(64.77,36.068) 64.826,36.068 66.085,37.327
  other v1: 72.936,45.175
NetE_PAD2_18: E_PAD2.18 J4.2 | length 24.4
  Top Layer w0.1: 11.694,-18.141 11.336,-18.5 11.336,-26.984 15.78,-31.429 J4.2
  other v1: 74.35,46.589
  other v2: 64.945,36.905
NetE_PAD2_19: E_PAD2.19 J4.3 | length 24.7
  Top Layer w0.1: 11.986,-18.209 11.536,-18.659 11.536,-26.664 16.78,-31.908 J4.3
  other v1: 75.765,48.003
  other v2: 64.943,37.624
NetE_PAD2_20: E_PAD2.20 J4.4 | length 24.8
  Top Layer w0.1: 12.164,-18.39 11.736,-18.818 11.736,-26.344 17.78,-32.388 J4.4
  other v1: 77.248,49.477
  other v2: 64.945,38.342
NetE_PAD2_21: E_PAD2.21 J4.5 | length 25.1
  Top Layer w0.1: 12.424,-18.49 11.936,-18.978 11.936,-26.023 18.78,-32.867 J4.5
  other v1: 70.108,45.175
  other v2: 64.945,39.061
NetE_PAD2_22: E_PAD2.22 J4.6 | length 25.4
  Top Layer w0.1: 12.705,-18.517 12.136,-19.086 12.136,-25.678 19.78,-33.322 J4.6
  other v1: 71.522,46.589
  other v2: 64.945,39.779
NetE_PAD2_23: E_PAD2.23 J4.7 | length 25.8
  Top Layer w0.1: 13.028,-18.477 12.336,-19.169 12.336,-25.319 20.78,-33.763 J4.7
  other v1: 72.936,48.003
  other v2: 64.945,40.497
NetE_PAD2_24: E_PAD2.24 J4.8 | length 26.1
  Top Layer w0.1: 13.254,-18.558 12.536,-19.276 12.536,-24.972 21.78,-34.216 J4.8
  other v1: 74.35,49.418
  other v2: 64.945,41.216
NetE_PAD2_25: E_PAD2.25 J4.9 | length 26.9
  Top Layer w0.1: 13.116,-19.055 12.736,-19.435 12.736,-24.652 22.78,-34.696 J4.9 ; 72.974,32.954 73.152,32.776 v2(73.152,32.512)
  Bottom Layer w0.1: v2(73.152,32.512) 73.152,32.788 73.356,32.992
  other v1: 81.409,42.359
NetE_PAD2_26: E_PAD2.26 J4.10 | length 28.2
  Top Layer w0.1: 13.635,-18.842 12.936,-19.541 12.936,-24.354 23.78,-35.198 J4.10 ; 72.474,32.954 72.517,32.911 v2(72.517,32.512)
  Bottom Layer w0.1: v2(72.517,32.512) 72.517,32.724 73.286,33.493
  other v1: 79.994,40.945
NetE_PAD2_27: E_PAD2.27 J4.11 | length 27
  Top Layer w0.1: 13.728,-19.032 13.136,-19.624 13.136,-24.271 24.78,-35.915 J4.11
  Bottom Layer w0.1: v2(71.755,32.512) 71.755,32.885 71.824,32.954
  other v1: 78.58,39.531
NetE_PAD2_28: E_PAD2.28 J4.12 | length 27.4
  Top Layer w0.1: 13.613,-19.455 13.336,-19.733 13.336,-24.188 25.78,-36.633 J4.12
  Bottom Layer w0.1: v2(70.993,32.512) 70.993,32.637 71.651,33.294
  other v1: 77.166,38.117
NetE_PAD2_29: E_PAD2.29 J4.13 | length 27.8
  Top Layer w0.1: 13.793,-19.635 13.536,-19.892 13.536,-24.105 26.78,-37.35 J4.13
  Bottom Layer w0.1: v2(70.358,32.512) 70.358,32.72 71.132,33.494
  other v1: 81.468,45.257
NetE_PAD2_30: E_PAD2.30 J4.14 | length 27.6
  Top Layer w0.1: 14.036,-19.751 13.736,-20.051 13.736,-24.023 27.78,-38.067 J4.14 ; 69.563,32.952 69.596,32.919 v2(69.596,32.512)
  Bottom Layer w0.1: v2(69.596,32.512) 69.596,32.935 69.615,32.954
  other v1: 79.994,43.774
NetE_PAD2_31: E_PAD2.31 J4.15 | length 101.5
  Top Layer w0.1: J4.15 28.78,-38.784 13.936,-23.94 13.936,-20.21 66.983,32.837
  other v1: 78.58,42.359
  other v2: 68.961,32.512
NetE_PAD2_32: E_PAD2.32 J4.16 | length 104
  Top Layer w0.1: J4.16 29.78,-39.051 14.136,-23.407 14.136,-21.043 v2(67.437,32.258)
  Bottom Layer w0.1: v2(67.437,32.258) 67.482,32.258 69.318,34.094
  other v1: 77.166,40.945
NetE_PAD3_1: E_PAD3.1 J5.16 | length 37.8
  Bottom Layer w0.1: J5.16@-6.865,-51.054 -6.865,-30.741 -1.27,-25.146 -1.27,-15.653 -1.27,-15.612
  other v1: -2.483,70.966
NetE_PAD3_2: E_PAD3.2 J5.15 | length 37.5
  Bottom Layer w0.1: J5.15 -5.921,-30.132 -1.016,-25.227 -1.016,-15.579
  other v1: -2.476,68.966
NetE_PAD3_3: E_PAD3.3 J5.14 | length 37.2
  Bottom Layer w0.1: J5.14 -4.921,-29.415 -0.762,-25.256 -0.762,-15.566 -0.762,-15.553
  other v1: -0.508,79.057
NetE_PAD3_4: E_PAD3.4 J5.13 | length 36.9
  Bottom Layer w0.1: J5.13 -3.921,-28.698 -0.508,-25.285 -0.508,-15.579
  other v1: -0.483,76.966
NetE_PAD3_5: E_PAD3.5 J5.12 | length 36.6
  Bottom Layer w0.1: J5.12 -2.921,-27.98 -0.254,-25.313 -0.254,-15.514
  other v1: -0.483,74.966
NetE_PAD3_6: E_PAD3.6 J5.11 | length 36.3
  Bottom Layer w0.1: J5.11 -1.921,-27.263 -0.039,-25.381 -0.039,-15.566
  other v1: -0.483,72.966
NetE_PAD3_7: E_PAD3.7 J5.10 | length 35.9
  Bottom Layer w0.1: J5.10 -0.921,-26.546 0.161,-25.464 0.161,-15.586
  other v1: -0.483,70.966
NetE_PAD3_8: E_PAD3.8 J5.9 | length 113.9
  Bottom Layer w0.1: J5.9 0.079,-25.829 0.361,-25.547 0.361,62.758
  other v1: -0.483,68.966
NetE_PAD3_9: E_PAD3.9 J5.8 | length 35.7
  Bottom Layer w0.1: 0.655,-15.566 0.655,-25.42 1.079,-25.844 J5.8
  other v1: 1.499,68.966
NetE_PAD3_10: E_PAD3.10 J5.7 | length 36
  Bottom Layer w0.1: 0.855,-15.566 0.855,-25.337 2.079,-26.561 J5.7
  other v1: 1.499,70.966
NetE_PAD3_11: E_PAD3.11 J5.6 | length 36.3
  Bottom Layer w0.1: 1.055,-15.566 1.055,-25.254 3.079,-27.278 J5.6
  other v1: 1.499,72.966
NetE_PAD3_12: E_PAD3.12 J5.5 | length 36.7
  Bottom Layer w0.1: 1.27,-15.494 1.27,-25.186 4.079,-27.995 J5.5
  other v1: 1.499,74.966
NetE_PAD3_13: E_PAD3.13 J5.4 | length 37
  Bottom Layer w0.1: 1.524,-15.566 1.524,-25.158 5.079,-28.713 J5.4
  other v1: 1.499,76.966
NetE_PAD3_14: E_PAD3.14 J5.3 | length 37.3
  Bottom Layer w0.1: 1.778,-15.566 1.778,-25.129 6.079,-29.43 J5.3
  other v1: 1.524,79.057
NetE_PAD3_15: E_PAD3.15 J5.2 | length 37.6
  Bottom Layer w0.1: 2.032,-15.566 2.032,-25.1 7.079,-30.147 J5.2
  other v1: 3.492,68.966
NetE_PAD3_16: E_PAD3.16 J5.1 | length 37.9
  Bottom Layer w0.1: 2.286,-15.566 2.286,-25.019 8.079,-30.812 J5.1
  other v1: 3.499,70.966
NetE_PAD3_17: E_PAD3.17 J6.1 | length 105.3
  Top Layer w0.1: J6.1 -6.921,-30.797 -1.905,-25.781 v2(-1.905,60.452)
  Bottom Layer w0.1: v2(-1.905,60.452) -1.905,62.7
  other v1: -2.483,72.966
NetE_PAD3_18: E_PAD3.18 J6.2 | length 27
  Top Layer w0.1: J6.2 -5.921,-30.132 -1.016,-25.227 -1.016,-15.534
  other v1: -2.483,74.966
  other v2: -2.286,61.468
NetE_PAD3_19: E_PAD3.19 J6.3 | length 26.6
  Top Layer w0.1: J6.3 -4.921,-29.415 -0.762,-25.256 -0.762,-15.611
  other v1: -2.483,76.966
  other v2: -2.795,61.975
NetE_PAD3_20: E_PAD3.20 J6.4 | length 26.4
  Top Layer w0.1: J6.4 -3.921,-28.698 -0.508,-25.285 -0.508,-15.541
  other v1: -2.476,79.057
  other v2: -3.302,62.484
NetE_PAD3_21: E_PAD3.21 J6.5 | length 26.1
  Top Layer w0.1: J6.5 -2.921,-27.98 -0.254,-25.313 -0.254,-15.525
  other v1: -4.483,70.966
  other v2: -3.81,62.992
NetE_PAD3_22: E_PAD3.22 J6.6 | length 25.7
  Top Layer w0.1: J6.6 -1.921,-27.263 -0.036,-25.378 -0.036,-15.566
  other v1: -4.483,72.966
  other v2: -4.318,63.5
NetE_PAD3_23: E_PAD3.23 J6.7 | length 25.8
  Top Layer w0.1: J6.7 -0.921,-26.546 0.164,-25.461 0.164,-15.566 0.164,-15.129
  other v1: -4.483,74.966
  other v2: -4.826,64.008
NetE_PAD3_24: E_PAD3.24 J6.8 | length 25.1
  Top Layer w0.1: J6.8 0.079,-25.829 0.381,-25.527 0.381,-15.566
  other v1: -4.483,76.966
  other v2: -5.334,64.516
NetE_PAD3_25: E_PAD3.25 J6.9 | length 25.1
  Top Layer w0.1: 0.635,-15.566 0.635,-25.4 1.079,-25.844 J6.9
  other v1: 5.499,76.966
  other v2: 6.35,64.516
NetE_PAD3_26: E_PAD3.26 J6.10 | length 25.5
  Top Layer w0.1: 0.852,-15.566 0.852,-25.334 2.079,-26.561 J6.10
  other v1: 5.499,74.966
  other v2: 5.842,64.008
NetE_PAD3_27: E_PAD3.27 J6.11 | length 25.8
  Top Layer w0.1: 1.055,-15.566 1.055,-25.254 3.079,-27.278 J6.11
  other v1: 5.499,72.966
  other v2: 5.334,63.5
NetE_PAD3_28: E_PAD3.28 J6.12 | length 26.2
  Top Layer w0.1: 1.27,-15.494 1.27,-15.566 1.27,-25.186 4.079,-27.995 J6.12
  other v1: 5.499,70.966
  other v2: 4.826,62.992
NetE_PAD3_29: E_PAD3.29 J6.13 | length 26.4
  Top Layer w0.1: 1.524,-15.566 1.524,-25.158 5.079,-28.713 J6.13
  other v1: 3.492,79.057
  other v2: 4.318,62.484
NetE_PAD3_30: E_PAD3.30 J6.14 | length 26.7
  Top Layer w0.1: 1.778,-15.566 1.778,-15.621 1.778,-25.129 6.079,-29.43 J6.14
  other v1: 3.499,76.966
  other v2: 3.811,61.975
NetE_PAD3_31: E_PAD3.31 J6.15 | length 27
  Top Layer w0.1: 2.032,-15.566 2.032,-25.1 7.079,-30.147 J6.15
  other v1: 3.499,74.966
  other v2: 3.302,61.468
NetE_PAD3_32: E_PAD3.32 J6.16 | length 105.3
  Top Layer w0.1: v2(2.921,60.579) 2.921,-25.654 8.079,-30.812 J6.16
  Bottom Layer w0.1: v2(2.921,60.579) 2.921,62.7
  other v1: 3.499,72.966
pads on no net: J1.17 J1.18 J2.17 J2.18 J3.17 J3.18 J4.17 J4.18 J5.17 J5.18 J6.17 J6.18

## Silkscreen, mask and mechanical layers (free items; w line width, h text height)
Mechanical 13:
  the board outline again, w0.3